# Altium PCB PCB1.PcbDoc (part 7 of 7)
Units mil, origin at the board's own origin, x right, y up, seen from the top; angles counter-clockwise.
Board outline 7650 x 4400 mil, 2 copper layers (Top Layer, Bottom Layer); 123 components, 190 nets, 788 pads, 165 vias.
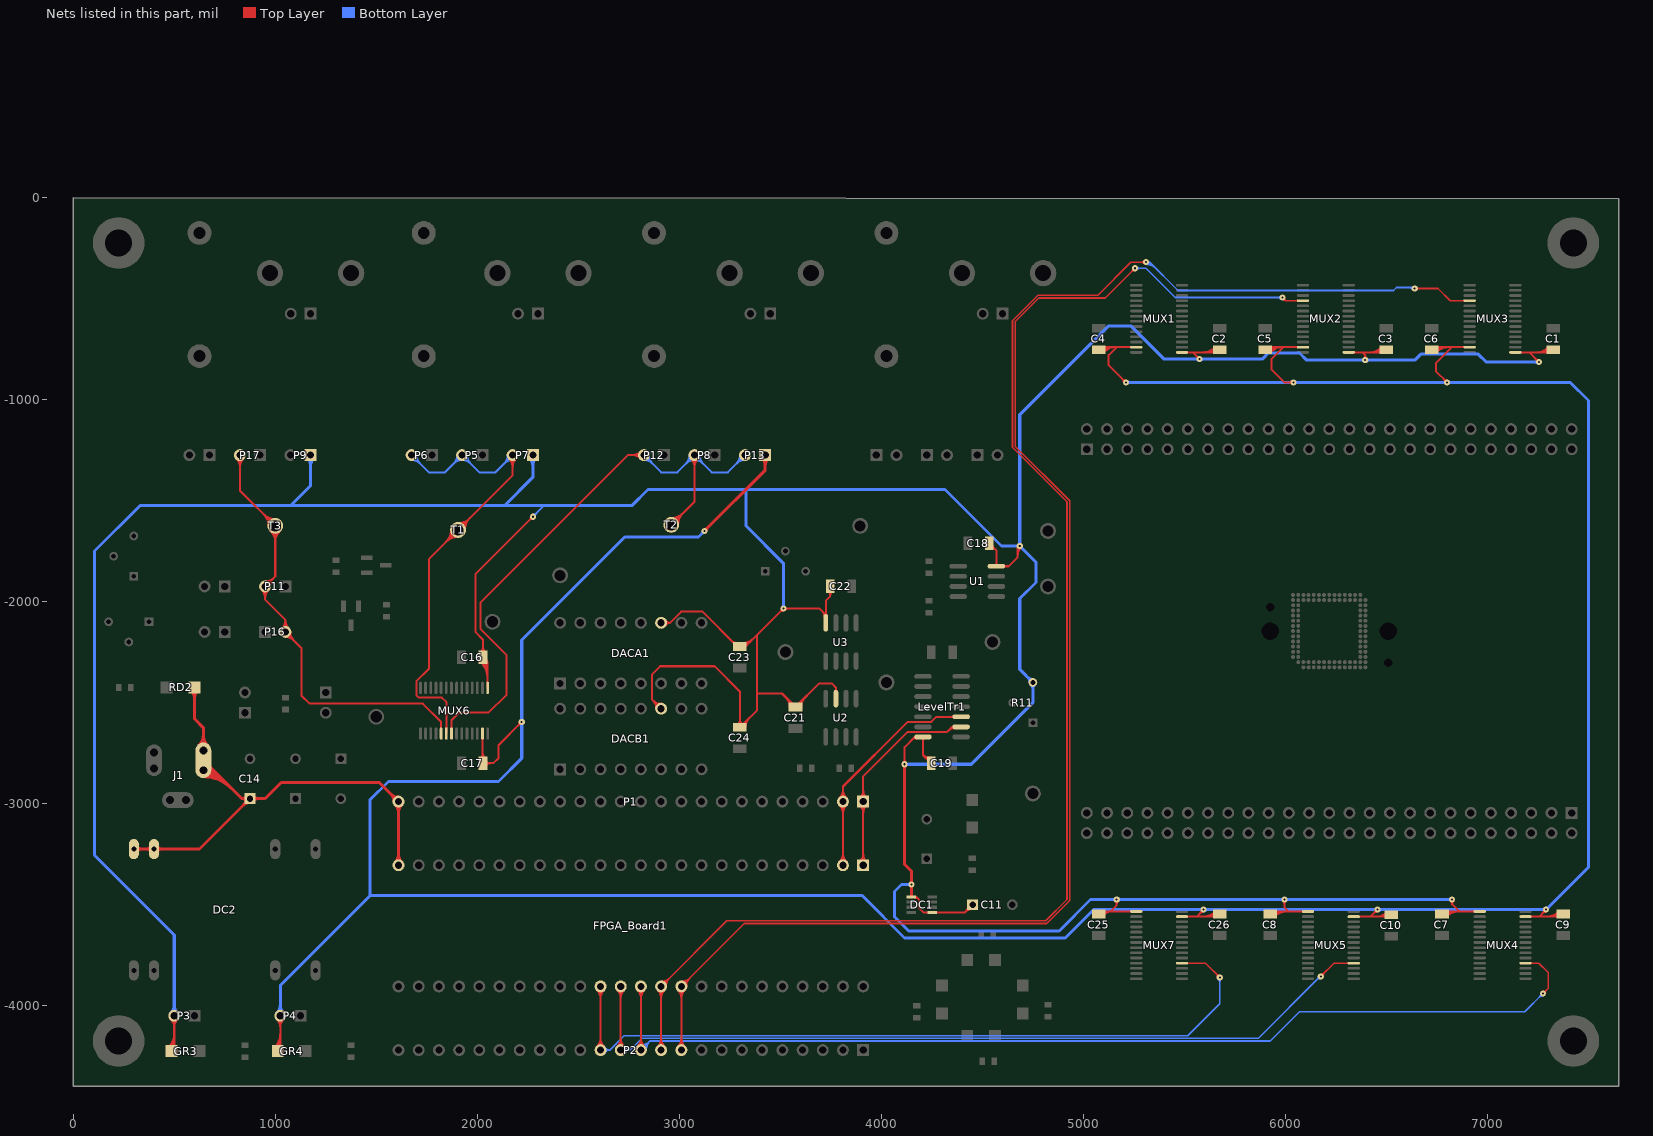
[diagram p7: the nets of this part, all layers, seen from the top]

## Via types
v1: diameter 30, hole 10, Top Layer to Bottom Layer, 118 vias
v2: diameter 20, hole 6, Top Layer to Bottom Layer, 47 vias

## Nets (pads, with @x,y where several pads share a name; then routed paths per layer and width w, separated by ;. In a path a pad name is that pad's centre, name@x,y a point inside that pad or via, vN(x,y) a via of type N, cw(c..) or ccw(c..) an arc to the next point about the centre after c; other vN are vias at no path point) (continued)
S1: FPGA_Board1.39 MUX2.18 P2.10 | length 7627.6
  Top Layer w8: FPGA_Board1.39@3010,-3905 3322,-3593 4818.62,-3593 4932,-3479.62 4932,-1500.38 4662,-1230.38 4662,-614.62 4779.18,-497.43 5107.57,-497.43 v1(5255,-350) ; FPGA_Board1.39@3010,-3887.47 ccw(c3010,-3845.16) 3039.92,-3875.08 ccw(c3069.84,-3905) FPGA_Board1.39@3027.53,-3905 ; FPGA_Board1.39@3010,-3879.47 ccw(c3010,-3817.84) 3053.58,-3861.42 ccw(c3097.16,-3905) FPGA_Board1.39@3035.53,-3905 ; v1@5244,-350 cw(c5217.44,-350) 5236.22,-368.78 cw(c5255,-387.56) v1@5255,-361 ; v1(5985,-495) 6000.43,-510.43 ; v1@5986.63,-505.88 cw(c5989.01,-521.85) 6000.43,-510.43 ; v1@5995.88,-496.63 ccw(c6011.85,-499.01) 6000.43,-510.43 ; MUX2.18@6086.81,-510.43 6000.43,-510.43 ; 6056.21,-510.43 ccw(c6056.21,-503.46) 6061.15,-508.39 cw(c6056.21,-503.46) 6056.21,-510.43 ; 6056.21,-510.43 cw(c6056.21,-517.41) 6061.15,-512.48 ccw(c6056.21,-517.41) 6056.21,-510.43
  Top Layer w10: P2.10@2992.66,-4202.66 ccw(c2950.79,-4160.79) 3010,-4160.79 ccw(c3069.21,-4160.79) P2.10@3027.34,-4202.66 ; FPGA_Board1.39@2992.66,-3922.34 cw(c2950.79,-3964.21) 3010,-3964.21 cw(c3069.21,-3964.21) FPGA_Board1.39@3027.34,-3922.34 ; P2.10@2999.73,-4209.73 ccw(c2974.93,-4184.93) 3010,-4184.93 ccw(c3045.07,-4184.93) P2.10@3020.27,-4209.73 ; FPGA_Board1.39@2999.73,-3915.27 cw(c2974.93,-3940.07) 3010,-3940.07 cw(c3045.07,-3940.07) FPGA_Board1.39@3020.27,-3915.27 ; P2.10@3010,-4220 FPGA_Board1.39@3010,-3905
  Bottom Layer w8: v1(5255,-350) 5310,-350 5455,-495 v1(5985,-495) ; v1@5262.78,-357.78 cw(c5281.56,-376.56) 5281.56,-350 cw(c5281.56,-323.44) v1@5262.78,-342.22 ; v1@5977.22,-502.78 ccw(c5958.44,-521.56) 5958.44,-495 ccw(c5958.44,-468.44) v1@5977.22,-487.22
S2: FPGA_Board1.38 MUX3.18 P2.11 | length 8740.2
  Top Layer w8: FPGA_Board1.38@2910,-3905 3235,-3580 4813.23,-3580 4919,-3474.23 4919,-1505.77 4649,-1235.77 4649,-609.23 4773.8,-484.43 5070.57,-484.43 5235,-320 v1(5310,-320) ; FPGA_Board1.38@2910,-3887.47 ccw(c2910,-3845.16) 2939.92,-3875.08 ccw(c2969.84,-3905) FPGA_Board1.38@2927.53,-3905 ; FPGA_Board1.38@2910,-3879.47 ccw(c2910,-3817.84) 2953.58,-3861.42 ccw(c2997.16,-3905) FPGA_Board1.38@2935.53,-3905 ; v1@5302.22,-327.78 ccw(c5283.44,-346.56) 5283.44,-320 ccw(c5283.44,-293.44) v1@5302.22,-312.22 ; v1(6640,-450) 6755,-450 6815.43,-510.43 MUX3.18@6911.81,-510.43 ; v1@6647.78,-457.78 cw(c6666.56,-476.56) 6666.56,-450 cw(c6666.56,-423.44) v1@6647.78,-442.22 ; 6881.21,-510.43 ccw(c6881.21,-503.46) 6886.15,-508.39 cw(c6881.21,-503.46) 6881.21,-510.43 ; 6881.21,-510.43 cw(c6881.21,-517.41) 6886.15,-512.48 ccw(c6881.21,-517.41) 6881.21,-510.43
  Top Layer w10: P2.11@2892.66,-4202.66 ccw(c2850.79,-4160.79) 2910,-4160.79 ccw(c2969.21,-4160.79) P2.11@2927.34,-4202.66 ; FPGA_Board1.38@2892.66,-3922.34 cw(c2850.79,-3964.21) 2910,-3964.21 cw(c2969.21,-3964.21) FPGA_Board1.38@2927.34,-3922.34 ; P2.11@2899.73,-4209.73 ccw(c2874.93,-4184.93) 2910,-4184.93 ccw(c2945.07,-4184.93) P2.11@2920.27,-4209.73 ; FPGA_Board1.38@2899.73,-3915.27 cw(c2874.93,-3940.07) 2910,-3940.07 cw(c2945.07,-3940.07) FPGA_Board1.38@2920.27,-3915.27 ; P2.11@2910,-4220 FPGA_Board1.38@2910,-3905
  Bottom Layer w8: v1@5310,-331 cw(c5310,-401.33) 5359.73,-351.6 ; v1@5310,-323 cw(c5310,-374.01) 5346.07,-337.94 ; v1(5310,-320) 5328.13,-320 ; v1@5310,-315 cw(c5310,-346.7) 5332.41,-324.28 ; 6601.37,-445 cw(c6601.37,-488.63) v1@6632.22,-457.78 ; 6620.69,-445 cw(c6620.69,-469.31) v1@6637.88,-452.12 ; 6625.51,-445 ccw(c6625.51,-435.51) v1@6632.22,-442.22 ; v1(6640,-450) 6635,-445 6550,-445 6535,-460 5468.13,-460 5328.13,-320 ; 5328.13,-320 ccw(c5328.13,-329.44) 5319.76,-325.08 cw(c5328.13,-329.44) 5328.13,-320 ; 5328.13,-320 cw(c5328.13,-310.56) 5319.76,-314.92 ccw(c5328.13,-310.56) 5328.13,-320
S3: FPGA_Board1.37 MUX4.18 P2.12 | length 5706.8
  Top Layer w8: MUX4.18@7188.19,-3789.57 7254.57,-3789.57 7300,-3835 7300,-3915 v1(7275,-3940) ; v1@7275,-3929 ccw(c7275,-3902.44) 7293.78,-3921.22 ccw(c7312.56,-3940) v1@7286,-3940 ; 7218.79,-3789.57 ccw(c7218.79,-3796.54) 7213.85,-3791.61 cw(c7218.79,-3796.54) 7218.79,-3789.57 ; 7218.79,-3789.57 cw(c7218.79,-3782.59) 7213.85,-3787.52 ccw(c7218.79,-3782.59) 7218.79,-3789.57
  Top Layer w10: P2.12@2792.66,-4202.66 ccw(c2750.79,-4160.79) 2810,-4160.79 ccw(c2869.21,-4160.79) P2.12@2827.34,-4202.66 ; FPGA_Board1.37@2792.66,-3922.34 cw(c2750.79,-3964.21) 2810,-3964.21 cw(c2869.21,-3964.21) FPGA_Board1.37@2827.34,-3922.34 ; P2.12@2799.73,-4209.73 ccw(c2774.93,-4184.93) 2810,-4184.93 ccw(c2845.07,-4184.93) P2.12@2820.27,-4209.73 ; FPGA_Board1.37@2799.73,-3915.27 cw(c2774.93,-3940.07) 2810,-3940.07 cw(c2845.07,-3940.07) FPGA_Board1.37@2820.27,-3915.27 ; P2.12@2810,-4220 FPGA_Board1.37@2810,-3905
  Bottom Layer w8: P2.12@2810,-4220 2855,-4175 5925,-4175 6070,-4030 7185,-4030 v1(7275,-3940) ; P2.12@2810,-4202.47 ccw(c2810,-4160.16) 2839.92,-4190.08 ccw(c2869.84,-4220) P2.12@2827.53,-4220 ; P2.12@2810,-4194.47 ccw(c2810,-4132.84) 2853.58,-4176.42 ccw(c2897.16,-4220) P2.12@2835.53,-4220 ; v1@7264,-3940 cw(c7237.44,-3940) 7256.22,-3958.78 cw(c7275,-3977.56) v1@7275,-3951
S4: FPGA_Board1.36 MUX5.18 P2.13 | length 4618.9
  Top Layer w8: v1(6175,-3855) 6240.43,-3789.57 MUX5.18@6338.19,-3789.57 ; v1@6175,-3844 ccw(c6175,-3817.44) 6193.78,-3836.22 ccw(c6212.56,-3855) v1@6186,-3855 ; 6307.59,-3789.57 ccw(c6307.59,-3782.59) 6312.52,-3787.52 cw(c6307.59,-3782.59) 6307.59,-3789.57 ; 6307.59,-3789.57 cw(c6307.59,-3796.54) 6312.52,-3791.61 ccw(c6307.59,-3796.54) 6307.59,-3789.57
  Top Layer w10: P2.13@2692.66,-4202.66 ccw(c2650.79,-4160.79) 2710,-4160.79 ccw(c2769.21,-4160.79) P2.13@2727.34,-4202.66 ; FPGA_Board1.36@2692.66,-3922.34 cw(c2650.79,-3964.21) 2710,-3964.21 cw(c2769.21,-3964.21) FPGA_Board1.36@2727.34,-3922.34 ; P2.13@2699.73,-4209.73 ccw(c2674.93,-4184.93) 2710,-4184.93 ccw(c2745.07,-4184.93) P2.13@2720.27,-4209.73 ; FPGA_Board1.36@2699.73,-3915.27 cw(c2674.93,-3940.07) 2710,-3940.07 cw(c2745.07,-3940.07) FPGA_Board1.36@2720.27,-3915.27 ; P2.13@2710,-4220 FPGA_Board1.36@2710,-3905
  Bottom Layer w8: P2.13@2710,-4220 2755.51,-4220 ; P2.13@2724.96,-4229.14 cw(c2741.25,-4239.09) 2741.25,-4220 cw(c2741.25,-4200.91) P2.13@2724.96,-4210.86 ; P2.13@2731.78,-4233.31 cw(c2755.51,-4247.81) 2755.51,-4220 ; P2.13@2731.78,-4206.69 ccw(c2755.51,-4192.19) 2755.51,-4220 ; 6151.1,-3875.9 cw(c6175,-3899.8) v1@6175,-3866 ; 6158.34,-3868.66 ccw(c6144.69,-3855) v1@6164,-3855 ; v1(6175,-3855) 6172,-3855 5865,-4162 2813.51,-4162 2755.51,-4220
S5: FPGA_Board1.35 MUX7.18 P2.14 | length 4318.7
  Top Layer w8: MUX7.18@5488.19,-3789.57 5604.57,-3789.57 v1(5675,-3860) ; v1@5664,-3860 ccw(c5637.44,-3860) 5656.22,-3841.22 ccw(c5675,-3822.44) v1@5675,-3849 ; 5518.79,-3789.57 ccw(c5518.79,-3796.54) 5513.85,-3791.61 cw(c5518.79,-3796.54) 5518.79,-3789.57 ; 5518.79,-3789.57 cw(c5518.79,-3782.59) 5513.85,-3787.52 ccw(c5518.79,-3782.59) 5518.79,-3789.57
  Top Layer w10: P2.14@2592.66,-4202.66 ccw(c2550.79,-4160.79) 2610,-4160.79 ccw(c2669.21,-4160.79) P2.14@2627.34,-4202.66 ; FPGA_Board1.35@2592.66,-3922.34 cw(c2550.79,-3964.21) 2610,-3964.21 cw(c2669.21,-3964.21) FPGA_Board1.35@2627.34,-3922.34 ; P2.14@2599.73,-4209.73 ccw(c2574.93,-4184.93) 2610,-4184.93 ccw(c2645.07,-4184.93) P2.14@2620.27,-4209.73 ; FPGA_Board1.35@2599.73,-3915.27 cw(c2574.93,-3940.07) 2610,-3940.07 cw(c2645.07,-3940.07) FPGA_Board1.35@2620.27,-3915.27 ; P2.14@2610,-4220 FPGA_Board1.35@2610,-3905
  Bottom Layer w8: P2.14@2610,-4220 2655.51,-4220 ; P2.14@2624.96,-4229.14 cw(c2641.25,-4239.09) 2641.25,-4220 cw(c2641.25,-4200.91) P2.14@2624.96,-4210.86 ; P2.14@2631.78,-4233.31 cw(c2655.51,-4247.81) 2655.51,-4220 ; P2.14@2631.78,-4206.69 ccw(c2655.51,-4192.19) 2655.51,-4220 ; v1@5667.22,-3867.78 cw(c5648.44,-3886.56) 5675,-3886.56 cw(c5701.56,-3886.56) v1@5682.78,-3867.78 ; v1(5675,-3860) 5675,-3990 5516,-4149 2726.51,-4149 2655.51,-4220
VCOMP1: FPGA_Board1.1 LevelTr1.2 P1.1 | length 1566.2
  Top Layer w10: FPGA_Board1.1@3892.66,-3287.66 ccw(c3850.79,-3245.79) 3910,-3245.79 ccw(c3969.21,-3245.79) FPGA_Board1.1@3927.34,-3287.66 ; P1.1@3892.66,-3007.34 cw(c3850.79,-3049.21) 3910,-3049.21 cw(c3969.21,-3049.21) P1.1@3927.34,-3007.34 ; P1.1@3892.66,-2972.66 ccw(c3850.79,-2930.79) 3910,-2930.79 ccw(c3969.21,-2930.79) P1.1@3927.34,-2972.66 ; FPGA_Board1.1@3899.73,-3294.73 ccw(c3874.93,-3269.93) 3910,-3269.93 ccw(c3945.07,-3269.93) FPGA_Board1.1@3920.27,-3294.73 ; P1.1@3899.73,-3000.27 cw(c3874.93,-3025.07) 3910,-3025.07 cw(c3945.07,-3025.07) P1.1@3920.27,-3000.27 ; P1.1@3899.73,-2979.73 ccw(c3874.93,-2954.93) 3910,-2954.93 ccw(c3945.07,-2954.93) P1.1@3920.27,-2979.73 ; FPGA_Board1.1@3910,-3305 P1.1@3910,-2990 3910,-2865 4130.19,-2644.81 4325.19,-2644.81 4350,-2620 ; 4328.82,-2641.18 cw(c4363.5,-2675.86) LevelTr1.2@4363.5,-2626.81 ; 4345.9,-2624.1 cw(c4363.5,-2641.71) LevelTr1.2@4363.5,-2616.81 ; LevelTr1.2@4395,-2620 4350,-2620 ; 4350,-2620 ccw(c4350,-2610.02) 4358.03,-2615.95 cw(c4350,-2610.02) 4350,-2620 ; 4350,-2620 cw(c4350,-2629.98) 4358.03,-2624.05 ccw(c4350,-2629.98) 4350,-2620
VCOMP2: FPGA_Board1.2 LevelTr1.3 P1.2 | length 1588.1
  Top Layer w10: FPGA_Board1.2@3792.66,-3287.66 ccw(c3750.79,-3245.79) 3810,-3245.79 ccw(c3869.21,-3245.79) FPGA_Board1.2@3827.34,-3287.66 ; P1.2@3792.66,-3007.34 cw(c3750.79,-3049.21) 3810,-3049.21 cw(c3869.21,-3049.21) P1.2@3827.34,-3007.34 ; P1.2@3792.66,-2972.66 ccw(c3750.79,-2930.79) 3810,-2930.79 ccw(c3869.21,-2930.79) P1.2@3827.34,-2972.66 ; FPGA_Board1.2@3799.73,-3294.73 ccw(c3774.93,-3269.93) 3810,-3269.93 ccw(c3845.07,-3269.93) FPGA_Board1.2@3820.27,-3294.73 ; P1.2@3799.73,-3000.27 cw(c3774.93,-3025.07) 3810,-3025.07 cw(c3845.07,-3025.07) P1.2@3820.27,-3000.27 ; P1.2@3799.73,-2979.73 ccw(c3774.93,-2954.93) 3810,-2954.93 ccw(c3845.07,-2954.93) P1.2@3820.27,-2979.73 ; FPGA_Board1.2@3810,-3305 P1.2@3810,-2990 3810,-2915 4130.19,-2594.81 4247.8,-2594.81 4272.61,-2570 LevelTr1.3@4395,-2570 ; LevelTr1.3@4358.69,-2574.82 ccw(c4347.06,-2586.44) 4347.06,-2570 ccw(c4347.06,-2553.56) LevelTr1.3@4358.69,-2565.18
VDD: C1.2 C2.1 C3.1 C7.1 C8.2 C11.1 C16.1 C18.2 C19.2 C21.1 C22.2 C23.1 C24.2 C25.2 DACA1.11 DACB1.11 DC1.1 DC1.5 GR3.1 LevelTr1.14 MUX1.1 MUX2.1 MUX3.1 MUX4.1 MUX5.1 MUX6.1 MUX7.1 P3.2 P7.1 P9.1 R11.3 U1.8 U2.7 U3.8 | length 28566.7
  Top Layer w10: GR3.1@469.86,-4207.66 ccw(c397.1,-4134.89) 500,-4134.89 ; GR3.1@476.93,-4214.73 ccw(c421.24,-4159.04) 500,-4159.04 ; P3.2@482.66,-4067.34 cw(c440.79,-4109.21) 500,-4109.21 cw(c559.21,-4109.21) P3.2@517.34,-4067.34 ; GR3.1@484,-4221.8 ccw(c445.38,-4183.18) 500,-4183.18 ; GR3.1@487.2,-4225 500,-4212.2 P3.2@500,-4050 ; P3.2@489.73,-4060.27 cw(c464.93,-4085.07) 500,-4085.07 cw(c535.07,-4085.07) P3.2@510.27,-4060.27 ; GR3.1@500,-4196.68 ccw(c515.53,-4196.68) GR3.1@504.55,-4207.66 ; C16.1@2016.37,-2298.59 cw(c1931.96,-2383) 2051.34,-2383 ; C16.1@2016.37,-2251.41 ccw(c1987.94,-2222.98) 2028.15,-2222.98 ccw(c2068.35,-2222.98) C16.1@2039.93,-2251.41 ; C16.1@2023.44,-2291.52 cw(c1956.1,-2358.86) 2051.34,-2358.86 ; C16.1@2030.52,-2284.44 cw(c1980.25,-2334.72) 2051.34,-2334.72 ; C16.1@2037.59,-2277.37 cw(c2004.39,-2310.57) 2051.34,-2310.57 ; C16.1@2044.8,-2286.81 ccw(c2056.49,-2286.81) C16.1@2048.23,-2295.08 ; MUX6.1@2051.34,-2426.81 2051.34,-2298.19 C16.1@2028.15,-2275 2028.15,-2188.15 1990,-2150 1990,-1865 v1(2275,-1580) ; v1@2265,-1580 cw(c2240.86,-1580) 2257.93,-1597.07 cw(c2275,-1614.14) v1@2275,-1590 ; DACB1.11@2885.47,-2530 ccw(c2826.26,-2530) 2868.13,-2488.13 ccw(c2910,-2446.26) DACB1.11@2910,-2505.47 ; DACB1.11@2895.47,-2530 ccw(c2860.4,-2530) 2885.2,-2505.2 ccw(c2910,-2480.4) DACB1.11@2910,-2515.47 ; DACB1.11@2910,-2530 2865,-2485 2865,-2360 2905,-2320 3175,-2320 3300,-2445 C24.2@3300,-2621.85 3385,-2536.85 3385,-2455 ; DACA1.11@2910,-2105 2954.1,-2105 ; DACA1.11@2930.84,-2117.94 cw(c2954.1,-2132.38) 2954.1,-2105 ; DACA1.11@2930.84,-2092.06 ccw(c2954.1,-2077.62) 2954.1,-2105 ; 3257.72,-2192.58 ccw(c3288.19,-2162.1) C23.1@3288.19,-2205.2 ; 3260.61,-2195.46 cw(c3234.22,-2221.85) C23.1@3271.54,-2221.85 ; C23.1@3285,-2221.85 C23.1@3285,-2219.86 ; C23.1@3286.99,-2221.85 C23.1@3285,-2219.86 ; C24.2@3288.22,-2610.07 ccw(c3259.79,-2581.65) 3300,-2581.65 ccw(c3340.21,-2581.65) C24.2@3311.78,-2610.07 ; C23.1@3300,-2221.85 3328.15,-2221.85 3385,-2165 ; C24.2@3311.81,-2605.2 ccw(c3311.81,-2593.51) C24.2@3320.08,-2601.77 ; C23.1@3311.81,-2225.2 ccw(c3311.81,-2193.83) 3333.99,-2216.01 ; C23.1@3311.81,-2215.2 ccw(c3311.81,-2159.69) 3351.06,-2198.94 ; C23.1@3311.81,-2205.2 ccw(c3311.81,-2125.55) 3368.13,-2181.87 ; C24.2@3318.46,-2621.85 cw(c3363.04,-2621.85) 3331.52,-2590.33 ; C24.2@3328.46,-2621.85 cw(c3397.18,-2621.85) 3348.59,-2573.26 ; v1@3505,-2035 cw(c3480.86,-2035) 3497.93,-2052.07 cw(c3515,-2069.14) v1@3515,-2045 ; v1@3522.07,-2042.07 cw(c3539.14,-2059.14) 3539.14,-2035 cw(c3539.14,-2010.86) v1@3522.07,-2027.93 ; 3526.41,-2473.26 cw(c3477.82,-2521.85) C21.1@3546.54,-2521.85 ; 3543.48,-2490.33 cw(c3511.96,-2521.85) C21.1@3556.54,-2521.85 ; C21.1@3554.92,-2501.77 ccw(c3563.19,-2493.51) C21.1@3563.19,-2505.2 ; C21.1@3586.81,-2505.2 ccw(c3586.81,-2493.51) C21.1@3595.08,-2501.77 ; C21.1@3593.46,-2521.85 cw(c3638.04,-2521.85) 3606.52,-2490.33 ; C21.1@3603.46,-2521.85 cw(c3672.18,-2521.85) 3623.59,-2473.26 ; 3707,-2047 cw(c3679.98,-2074.02) U3.8@3718.19,-2074.02 ; U3.8@3720.18,-2069.2 ccw(c3708.56,-2057.57) 3725,-2057.57 ccw(c3741.44,-2057.57) U3.8@3729.82,-2069.2 ; U3.8@3725,-2105.51 U3.8@3725,-2065 ; C22.2@3735.98,-1949.43 cw(c3715.54,-1973.15) 3746.85,-1973.15 ; C22.2@3746.85,-1925 3746.85,-1973.15 ; C22.2@3757.72,-1949.43 ccw(c3778.17,-1973.15) 3746.85,-1973.15 ; U2.7@3770.18,-2444.2 ccw(c3758.56,-2432.57) 3775,-2432.57 ccw(c3791.44,-2432.57) U2.7@3779.82,-2444.2 ; U2.7@3775,-2480.51 3775,-2425 3755,-2405 3691.85,-2405 C21.1@3575,-2521.85 3508.15,-2455 3385,-2455 ; v1@4107.93,-2797.93 ccw(c4090.86,-2780.86) 4115,-2780.86 ccw(c4139.14,-2780.86) v1@4122.07,-2797.93 ; v1(4115,-2805) 4115,-2720 4165,-2670 LevelTr1.14@4206.02,-2670 4206.02,-2759.17 ; 4146.64,-2688.36 cw(c4174.53,-2716.26) LevelTr1.14@4174.53,-2676.81 ; DC1.1@4148.43,-3461.61 4173.11,-3461.61 4185.44,-3473.95 4185.44,-3515.44 4208.39,-3538.39 DC1.5@4251.57,-3538.39 4413.19,-3538.39 C11.1@4451.57,-3500 ; DC1.1@4167.06,-3460.18 ccw(c4181.27,-3451.97) 4177.02,-3467.83 ; 4219.99,-2773.14 ccw(c4241.28,-2751.85) C19.2@4245.84,-2781.61 ; C19.2@4226.77,-2779.92 cw(c4218.51,-2788.19) C19.2@4230.2,-2788.19 ; C19.2@4244.33,-2771.73 cw(c4237.57,-2727.63) 4206.03,-2759.17 ; C19.2@4246.85,-2800 4206.02,-2759.17 ; C11.1@4430,-3500 cw(c4377.91,-3500) 4414.74,-3536.83 cw(c4451.57,-3573.66) C11.1@4451.57,-3521.57 ; C11.1@4440,-3500 cw(c4412.06,-3500) 4431.82,-3519.76 cw(c4451.57,-3539.52) C11.1@4451.57,-3511.57 ; C18.2@4533.58,-1710 4569.49,-1745.91 ; C18.2@4535.42,-1728.21 cw(c4541.62,-1749.78) 4557.49,-1733.91 ; C18.2@4538.18,-1737.82 cw(c4546.97,-1768.42) 4569.49,-1745.9 ; C18.2@4550.24,-1721.81 ccw(c4561.93,-1721.81) C18.2@4553.66,-1730.08 ; U1.8@4605.8,-1829.82 cw(c4617.43,-1841.44) 4617.43,-1825 cw(c4617.43,-1808.56) U1.8@4605.8,-1820.18 ; 4675,-1773.28 cw(c4733.28,-1773.28) v1@4692.07,-1732.07 ; 4675,-1749.14 cw(c4709.14,-1749.14) v1(4685,-1725) 4675,-1735 4675,-1780 4630,-1825 U1.8@4569.49,-1825 4569.49,-1745.91 ; C25.2@5075,-3546.85 5088.19,-3533.66 5135,-3533.66 ; C25.2@5092.77,-3549.82 cw(c5118.85,-3562.8) 5118.85,-3533.66 ; C25.2@5101.72,-3554.27 cw(c5135,-3570.83) 5135,-3533.66 ; v1@5157.93,-3482.07 cw(c5140.86,-3499.14) 5165,-3499.14 cw(c5189.14,-3499.14) v1@5172.07,-3482.07 ; v1(5165,-3475) 5165,-3503.66 5135,-3533.66 ; MUX7.1@5261.81,-3533.66 5135,-3533.66 ; MUX1.1@5488.19,-766.34 5541.34,-766.34 ; v1@5565,-800 ccw(c5540.86,-800) 5557.93,-782.93 ccw(c5575,-765.86) v1@5575,-790 ; v1(5575,-800) 5541.34,-766.34 ; 5591.14,-766.34 ccw(c5591.14,-681.1) C2.1@5651.41,-741.37 ; 5615.28,-766.34 ccw(c5615.28,-705.25) C2.1@5658.48,-748.44 ; 5639.43,-766.34 ccw(c5639.43,-729.39) C2.1@5665.56,-755.52 ; C2.1@5675,-753.15 5661.81,-766.34 5541.34,-766.34 ; C8.2@5925,-3546.85 5938.19,-3533.66 6015,-3533.66 ; C8.2@5934.44,-3544.48 cw(c5960.57,-3570.61) 5960.57,-3533.66 ; C8.2@5941.52,-3551.56 cw(c5984.72,-3594.75) 5984.72,-3533.66 ; C8.2@5948.59,-3558.63 cw(c6008.86,-3618.9) 6008.86,-3533.66 ; v1@5987.93,-3482.07 cw(c5970.86,-3499.14) 5995,-3499.14 cw(c6019.14,-3499.14) v1@6002.07,-3482.07 ; v1(5995,-3475) 5995,-3513.66 6015,-3533.66 ; MUX5.1@6111.81,-3533.66 6015,-3533.66 ; MUX2.1@6313.19,-766.34 6380,-766.34 ; v1@6388.03,-797.83 ccw(c6372.01,-781.34) 6395,-781.34 ; v1(6395,-805) 6395,-781.34 ; v1@6401.97,-797.83 cw(c6417.99,-781.34) 6395,-781.34 ; 6416.14,-766.34 ccw(c6416.14,-681.1) C3.1@6476.41,-741.37 ; 6440.28,-766.34 ccw(c6440.28,-705.25) C3.1@6483.48,-748.44 ; 6464.43,-766.34 ccw(c6464.43,-729.39) C3.1@6490.56,-755.52 ; C3.1@6500,-753.15 6486.81,-766.34 6380,-766.34 ; C7.1@6775,-3546.85 6788.19,-3533.66 6860,-3533.66 ; C7.1@6784.44,-3544.48 cw(c6810.57,-3570.61) 6810.57,-3533.66 ; C7.1@6791.52,-3551.56 cw(c6834.72,-3594.75) 6834.72,-3533.66 ; C7.1@6798.59,-3558.63 cw(c6858.86,-3618.9) 6858.86,-3533.66 ; v1@6818.03,-3482.17 cw(c6802.01,-3498.66) 6825,-3498.66 ; v1(6825,-3475) 6825,-3498.66 ; v1@6831.97,-3482.17 ccw(c6847.99,-3498.66) 6825,-3498.66 ; MUX4.1@6961.81,-3533.66 6860,-3533.66 ; MUX3.1@7138.19,-766.34 7206.34,-766.34 ; 7241.14,-766.34 ccw(c7241.14,-681.1) C1.2@7301.41,-741.37 ; v1@7245,-815 ccw(c7220.86,-815) 7237.93,-797.93 ccw(c7255,-780.86) v1@7255,-805 ; v1(7255,-815) 7206.34,-766.34 ; 7265.28,-766.34 ccw(c7265.28,-705.25) C1.2@7308.48,-748.44 ; 7289.43,-766.34 ccw(c7289.43,-729.39) C1.2@7315.56,-755.52 ; C1.2@7325,-753.15 7311.81,-766.34 7206.34,-766.34 ; 2954.1,-2105 3009.1,-2050 3115.14,-2050 C23.1@3285,-2219.86 ; 3385,-2455 3385,-2165 ; 3385,-2165 v1(3515,-2035) 3695,-2035 U3.8@3725,-2065 ; U3.8@3725,-2065 3725,-1995 3746.85,-1973.15 ; 4206.02,-2686.44 ccw(c4189.58,-2686.44) 4201.21,-2674.82 cw(c4189.58,-2686.44) 4206.02,-2686.44 ; 4206.02,-2686.44 cw(c4222.47,-2686.44) 4210.84,-2674.82 ccw(c4222.47,-2686.44) 4206.02,-2686.44 ; 4569.49,-1808.56 ccw(c4585.93,-1808.56) 4574.3,-1820.18 cw(c4585.93,-1808.56) 4569.49,-1808.56 ; 4569.49,-1808.56 cw(c4553.05,-1808.56) 4564.67,-1820.18 ccw(c4553.05,-1808.56) 4569.49,-1808.56 ; 6380,-766.34 6395,-781.34 ; 6825,-3498.66 6860,-3533.66 ; DC1.1@4164.57,-3464.49 cw(c4164.57,-3492.05) 4184.06,-3472.56 ccw(c4164.57,-3492.05) DC1.1@4164.57,-3464.49
  Top Layer w15: v1@4109.7,-2810.3 cw(c4096.89,-2823.11) 4115,-2823.11 cw(c4133.11,-2823.11) v1@4120.3,-2810.3 ; v1(4115,-2805) 4115,-3300 4148.43,-3333.43 v1(4148.43,-3400) DC1.1@4148.43,-3461.61 ; v1@4143.12,-3405.3 cw(c4130.32,-3418.11) 4148.43,-3418.11 cw(c4166.53,-3418.11) v1@4153.73,-3405.3 ; v1@4143.12,-3394.7 ccw(c4130.32,-3381.89) 4148.43,-3381.89 ccw(c4166.53,-3381.89) v1@4153.73,-3394.7
  Bottom Layer w10: v1(2275,-1580) 2330,-1525 ; v1@2275,-1570 ccw(c2275,-1545.86) 2292.07,-1562.93 ccw(c2309.14,-1580) v1@2285,-1580
  Bottom Layer w15: P3.2@484.42,-4034.42 ccw(c446.82,-3996.82) 500,-3996.82 ccw(c553.18,-3996.82) P3.2@515.58,-4034.42 ; P3.2@500,-4050 500,-3650 105,-3255 105,-1750 330,-1525 1075,-1525 ; P9.1@1159.42,-1290.58 cw(c1121.82,-1328.18) 1175,-1328.18 cw(c1228.18,-1328.18) P9.1@1190.58,-1290.58 ; P9.1@1175,-1275 1175,-1425 1075,-1525 ; P7.1@2259.42,-1290.58 cw(c2221.82,-1328.18) 2275,-1328.18 cw(c2328.18,-1328.18) P7.1@2290.58,-1290.58 ; P7.1@2275,-1275 2275,-1385 2135,-1525 ; v1@3509.7,-2029.7 ccw(c3496.89,-2016.89) 3515,-2016.89 ccw(c3533.11,-2016.89) v1@3520.3,-2029.7 ; v1(3515,-2035) 3515,-1810 3330,-1625 3330,-1445 ; v1(4115,-2805) 4445,-2805 4750,-2500 R11.3@4750,-2400 4685,-2335 4685,-1985 4765,-1905 4765,-1805 v1(4685,-1725) ; v1@4120.3,-2810.3 cw(c4133.11,-2823.11) 4133.11,-2805 cw(c4133.11,-2786.89) v1@4120.3,-2799.7 ; v1@4143.12,-3405.3 ccw(c4130.32,-3418.11) 4130.32,-3400 ccw(c4130.32,-3381.89) v1@4143.12,-3394.7 ; v1(4148.43,-3400) 4100,-3400 4065,-3435 4065,-3560 4135,-3630 4880,-3630 5035,-3475 v1(5165,-3475) v1(5995,-3475) v1(6825,-3475) ; v1@4679.7,-1730.3 ccw(c4666.89,-1743.11) 4666.89,-1725 ccw(c4666.89,-1706.89) 4679.7,-1719.7 ccw(c4666.89,-1706.89) 4685,-1706.89 ccw(c4703.11,-1706.89) v1@4690.3,-1719.7 ; v1@4685,-1732.5 cw(c4685,-1750.61) 4697.8,-1737.8 cw(c4710.61,-1725) v1@4692.5,-1725 ; R11.3@4735.85,-2400 ccw(c4701.68,-2400) 4725.84,-2375.84 ccw(c4750,-2351.68) R11.3@4750,-2385.85 ; R11.3@4739.99,-2410.01 cw(c4715.83,-2434.17) 4750,-2434.17 cw(c4784.17,-2434.17) R11.3@4760.01,-2410.01 ; v1@5159.7,-3480.3 ccw(c5146.89,-3493.11) 5146.89,-3475 ccw(c5146.89,-3456.89) v1@5159.7,-3469.7 ; v1@5170.3,-3480.3 cw(c5183.11,-3493.11) 5183.11,-3475 cw(c5183.11,-3456.89) v1@5170.3,-3469.7 ; v1@5569.7,-805.3 ccw(c5556.89,-818.11) 5556.89,-800 ccw(c5556.89,-781.89) v1@5569.7,-794.7 ; v1@5580.3,-805.3 cw(c5593.11,-818.11) 5593.11,-800 cw(c5593.11,-781.89) v1@5580.3,-794.7 ; v1@5989.7,-3480.3 ccw(c5976.89,-3493.11) 5976.89,-3475 ccw(c5976.89,-3456.89) v1@5989.7,-3469.7 ; v1@6000.3,-3480.3 cw(c6013.11,-3493.11) 6013.11,-3475 cw(c6013.11,-3456.89) v1@6000.3,-3469.7 ; v1@6389.7,-810.3 ccw(c6376.89,-823.11) 6376.89,-805 ccw(c6376.89,-786.89) v1@6389.7,-799.7 ; v1@6400.3,-810.3 cw(c6413.11,-823.11) 6413.11,-805 cw(c6413.11,-786.89) v1@6400.3,-799.7 ; v1@6819.7,-3480.3 ccw(c6806.89,-3493.11) 6806.89,-3475 ccw(c6806.89,-3456.89) v1@6819.7,-3469.7 ; v1@7249.7,-820.3 ccw(c7236.89,-833.11) 7236.89,-815 ccw(c7236.89,-796.89) v1@7249.7,-809.7 ; v1(7255,-815) 6995,-815 6955,-775 6670,-775 6640,-805 v1(6395,-805) 6105,-805 6070,-770 5915,-770 5885,-800 v1(5575,-800) 5400,-800 5235,-635 5125,-635 4685,-1075 v1(4685,-1725) ; 1075,-1525 2135,-1525 ; 2135,-1525 2330,-1525 2765,-1525 2845,-1445 3330,-1445 ; 3330,-1445 4315,-1445 4595,-1725 v1(4685,-1725)
VFORM: MUX6.19 P11.2 P16.2 P17.2 T3.1 | length 3346.3
  Top Layer w10: P17.2@807.66,-1292.34 cw(c765.79,-1334.21) 825,-1334.21 cw(c884.21,-1334.21) P17.2@842.34,-1292.34 ; P17.2@814.73,-1285.27 cw(c789.93,-1310.07) 825,-1310.07 cw(c860.07,-1310.07) P17.2@835.27,-1285.27 ; P17.2@825,-1275 825,-1450 T3.1@1000,-1625 1000,-1875 P11.2@950,-1925 950,-1990 1050,-2090 P16.2@1050,-2150 1130,-2230 1130,-2465 1170,-2505 1730,-2505 1821.02,-2596.02 MUX6.19@1821.02,-2653.19 ; P11.2@932.66,-1942.34 cw(c890.79,-1984.21) 950,-1984.21 cw(c1009.21,-1984.21) P11.2@967.34,-1942.34 ; P11.2@939.73,-1935.27 cw(c914.93,-1960.07) 950,-1960.07 cw(c985.07,-1960.07) P11.2@960.27,-1935.27 ; P11.2@950,-1910.47 ccw(c950,-1875.4) 974.8,-1900.2 ccw(c999.6,-1925) P11.2@964.53,-1925 ; P11.2@950,-1900.47 ccw(c950,-1841.26) 991.87,-1883.13 ccw(c1033.74,-1925) P11.2@974.53,-1925 ; T3.1@965.63,-1625 ccw(c882.65,-1625) 941.33,-1566.33 ccw(c1000,-1507.65) T3.1@1000,-1590.63 ; T3.1@975.63,-1625 ccw(c916.8,-1625) 958.4,-1583.4 ccw(c1000,-1541.8) T3.1@1000,-1600.63 ; T3.1@975.7,-1649.3 cw(c917.02,-1707.98) 1000,-1707.98 cw(c1082.98,-1707.98) T3.1@1024.3,-1649.3 ; T3.1@982.77,-1642.23 cw(c941.17,-1683.83) 1000,-1683.83 cw(c1058.83,-1683.83) T3.1@1017.23,-1642.23 ; P16.2@1032.66,-2132.66 ccw(c990.79,-2090.79) 1050,-2090.79 ccw(c1109.21,-2090.79) P16.2@1067.34,-2132.66 ; P16.2@1039.73,-2139.73 ccw(c1014.93,-2114.93) 1050,-2114.93 ccw(c1085.07,-2114.93) P16.2@1060.27,-2139.73 ; P16.2@1050,-2174.53 cw(c1050,-2233.74) 1091.87,-2191.87 cw(c1133.74,-2150) P16.2@1074.53,-2150 ; P16.2@1050,-2164.53 cw(c1050,-2199.6) 1074.8,-2174.8 cw(c1099.6,-2150) P16.2@1064.53,-2150
VRESET: MUX6.21 P8.2 P12.2 P13.2 T2.1 | length 4157.2
  Top Layer w10: MUX6.21@1872.2,-2653.19 1872.2,-2587.8 1910,-2550 2055,-2550 2145,-2460 2145,-2265 2015,-2135 2015,-2005 2745,-1275 P12.2@2825,-1275 ; P12.2@2807.66,-1292.34 ccw(c2765.79,-1334.21) 2765.79,-1275 ccw(c2765.79,-1215.79) P12.2@2807.66,-1257.66 ; P12.2@2814.73,-1285.27 ccw(c2789.93,-1310.07) 2789.93,-1275 ccw(c2789.93,-1239.93) P12.2@2814.73,-1264.73 ; T2.1@2960,-1620 3075,-1505 P8.2@3075,-1275 ; T2.1@2960,-1595.63 ccw(c2960,-1536.8) 3001.6,-1578.4 ccw(c3043.2,-1620) T2.1@2984.37,-1620 ; T2.1@2960,-1585.63 ccw(c2960,-1502.65) 3018.67,-1561.33 ccw(c3077.35,-1620) T2.1@2994.37,-1620 ; P8.2@3057.66,-1292.34 cw(c3015.79,-1334.21) 3075,-1334.21 cw(c3134.21,-1334.21) P8.2@3092.34,-1292.34 ; P8.2@3064.73,-1285.27 cw(c3039.93,-1310.07) 3075,-1310.07 cw(c3110.07,-1310.07) P8.2@3085.27,-1285.27
  Bottom Layer w10: P12.2@2825,-1299.53 cw(c2825,-1358.74) 2866.87,-1316.87 cw(c2908.74,-1275) P12.2@2849.53,-1275 ; P12.2@2825,-1289.53 cw(c2825,-1324.6) 2849.8,-1299.8 cw(c2874.6,-1275) P12.2@2839.53,-1275 ; P12.2@2825,-1275 2910,-1360 2990,-1360 P8.2@3075,-1275 3160,-1360 3240,-1360 P13.2@3325,-1275 ; P8.2@3050.47,-1275 cw(c2991.26,-1275) 3033.13,-1316.87 cw(c3075,-1358.74) 3075,-1299.53 cw(c3075,-1358.74) 3116.87,-1316.87 cw(c3158.74,-1275) P8.2@3099.53,-1275 ; P8.2@3060.47,-1275 cw(c3025.4,-1275) 3050.2,-1299.8 cw(c3075,-1324.6) 3075,-1289.53 cw(c3075,-1324.6) 3099.8,-1299.8 cw(c3124.6,-1275) P8.2@3089.53,-1275 ; P13.2@3300.47,-1275 cw(c3241.26,-1275) 3283.13,-1316.87 cw(c3325,-1358.74) P13.2@3325,-1299.53 ; P13.2@3310.47,-1275 cw(c3275.4,-1275) 3300.2,-1299.8 cw(c3325,-1324.6) P13.2@3325,-1289.53
VSET: MUX6.20 P5.2 P6.2 P7.2 T1.1 | length 3555.9
  Top Layer w10: MUX6.20@1846.61,-2653.19 1846.61,-2496.61 1825,-2475 1710,-2475 1698.77,-2463.77 1698.77,-2394.95 1760,-2333.72 1760,-1790 T1.1@1905,-1645 2175,-1375 P7.2@2175,-1275 ; T1.1@1870.63,-1645 cw(c1787.65,-1645) 1846.33,-1703.67 cw(c1905,-1762.35) T1.1@1905,-1679.37 ; T1.1@1880.63,-1645 cw(c1821.8,-1645) 1863.4,-1686.6 cw(c1905,-1728.2) T1.1@1905,-1669.37 ; T1.1@1905,-1620.63 ccw(c1905,-1561.8) 1946.6,-1603.4 ccw(c1988.2,-1645) T1.1@1929.37,-1645 ; T1.1@1905,-1610.63 ccw(c1905,-1527.65) 1963.67,-1586.33 ccw(c2022.35,-1645) T1.1@1939.37,-1645 ; P5.2@1925,-1300 P5.2@1925,-1275 ; P7.2@2157.66,-1292.34 cw(c2115.79,-1334.21) 2175,-1334.21 cw(c2234.21,-1334.21) P7.2@2192.34,-1292.34 ; P7.2@2164.73,-1285.27 cw(c2139.93,-1310.07) 2175,-1310.07 cw(c2210.07,-1310.07) P7.2@2185.27,-1285.27
  Bottom Layer w10: P6.2@1675,-1299.53 cw(c1675,-1358.74) 1716.87,-1316.87 cw(c1758.74,-1275) P6.2@1699.53,-1275 ; P6.2@1675,-1289.53 cw(c1675,-1324.6) 1699.8,-1299.8 cw(c1724.6,-1275) P6.2@1689.53,-1275 ; P6.2@1675,-1275 1760,-1360 1840,-1360 P5.2@1925,-1275 2010,-1360 2090,-1360 P7.2@2175,-1275 ; P5.2@1900.47,-1275 cw(c1841.26,-1275) 1883.13,-1316.87 cw(c1925,-1358.74) 1925,-1299.53 cw(c1925,-1358.74) 1966.87,-1316.87 cw(c2008.74,-1275) P5.2@1949.53,-1275 ; P5.2@1910.47,-1275 cw(c1875.4,-1275) 1900.2,-1299.8 cw(c1925,-1324.6) 1925,-1289.53 cw(c1925,-1324.6) 1949.8,-1299.8 cw(c1974.6,-1275) P5.2@1939.53,-1275 ; P7.2@2150.47,-1275 cw(c2091.26,-1275) 2133.13,-1316.87 cw(c2175,-1358.74) P7.2@2175,-1299.53 ; P7.2@2160.47,-1275 cw(c2125.4,-1275) 2150.2,-1299.8 cw(c2175,-1324.6) P7.2@2175,-1289.53
VSS: C4.1 C5.1 C6.2 C9.2 C10.2 C17.2 C26.2 GR4.2 MUX1.27 MUX2.27 MUX3.27 MUX4.27 MUX5.27 MUX6.27 MUX7.27 P4.2 P13.1 | length 20506.2
  Top Layer w10: GR4.2@994.86,-4207.66 ccw(c922.1,-4134.89) 1025,-4134.89 ; GR4.2@1001.93,-4214.73 ccw(c946.24,-4159.04) 1025,-4159.04 ; P4.2@1007.66,-4067.34 cw(c965.79,-4109.21) 1025,-4109.21 cw(c1084.21,-4109.21) P4.2@1042.34,-4067.34 ; GR4.2@1009,-4221.8 ccw(c970.38,-4183.18) 1025,-4183.18 ; GR4.2@1012.2,-4225 1025,-4212.2 P4.2@1025,-4050 ; P4.2@1014.73,-4060.27 cw(c989.93,-4085.07) 1025,-4085.07 cw(c1060.07,-4085.07) P4.2@1035.27,-4060.27 ; GR4.2@1025,-4196.68 ccw(c1040.53,-4196.68) GR4.2@1029.55,-4207.66 ; C17.2@2016.37,-2776.41 ccw(c1993.74,-2753.78) 2025.75,-2753.78 ; 2025.75,-2766.33 ccw(c2050.01,-2766.33) C17.2@2032.85,-2783.48 ; 2025.75,-2742.19 ccw(c2074.15,-2742.19) C17.2@2039.93,-2776.41 ; MUX6.27@2025.75,-2653.19 2025.75,-2797.6 C17.2@2028.15,-2800 2080,-2800 2105,-2775 2105,-2710 v1(2220,-2595) ; C17.2@2039.93,-2811.78 cw(c2068.35,-2840.21) 2068.35,-2800 cw(c2068.35,-2759.79) C17.2@2039.93,-2788.22 ; v1@2210,-2595 cw(c2185.86,-2595) 2202.93,-2612.07 cw(c2220,-2629.14) v1@2220,-2605 ; C4.1@5075,-753.15 5087.4,-740.75 5164.25,-740.75 ; C4.1@5084.18,-755.22 ccw(c5098.48,-743.99) C4.1@5107.58,-759.74 ; C4.1@5092.04,-749.04 ccw(c5107.64,-736.79) 5117.56,-753.97 ; C4.1@5099.29,-742.12 ccw(c5108.4,-734.06) 5114.48,-744.59 ; C4.1@5099.91,-742.87 ccw(c5116.81,-729.6) 5127.55,-748.2 ; C4.1@5102.9,-757.46 cw(c5120.54,-762.19) 5111.41,-746.37 ; v1@5200,-915 ccw(c5175.86,-915) 5192.93,-897.93 ccw(c5210,-880.86) v1@5210,-905 ; v1(5210,-915) 5125,-830 5125,-780 5164.25,-740.75 ; MUX1.27@5261.81,-740.75 5164.25,-740.75 ; MUX7.27@5488.19,-3559.25 5560.75,-3559.25 ; v1@5585,-3525 cw(c5560.86,-3525) 5577.93,-3542.07 cw(c5595,-3559.14) v1@5595,-3535 ; 5593.04,-3559.25 ccw(c5593.04,-3476.71) C26.2@5651.41,-3535.07 ; v1(5595,-3525) 5560.75,-3559.25 ; 5617.19,-3559.25 ccw(c5617.19,-3500.85) C26.2@5658.48,-3542.15 ; 5641.33,-3559.25 ccw(c5641.33,-3524.99) C26.2@5665.56,-3549.22 ; C26.2@5675,-3546.85 5662.6,-3559.25 5560.75,-3559.25 ; C5.1@5900,-753.15 5912.4,-740.75 5990,-740.75 ; C5.1@5909.18,-755.22 ccw(c5923.48,-743.99) C5.1@5932.58,-759.74 ; C5.1@5917.04,-749.04 ccw(c5932.64,-736.79) 5942.56,-753.97 ; C5.1@5924.29,-742.12 ccw(c5933.4,-734.06) 5939.48,-744.59 ; C5.1@5924.91,-742.87 ccw(c5941.81,-729.6) 5952.55,-748.2 ; C5.1@5927.9,-757.46 cw(c5945.54,-762.19) 5936.41,-746.37 ; v1@6032.93,-922.07 ccw(c6015.86,-939.14) 6015.86,-915 ccw(c6015.86,-890.86) v1@6032.93,-907.93 ; v1(6040,-915) 5995,-915 5930,-850 5930,-800.75 5990,-740.75 ; MUX2.27@6086.81,-740.75 5990,-740.75 ; MUX5.27@6338.19,-3559.25 6420.75,-3559.25 ; v1@6445,-3525 cw(c6420.86,-3525) 6437.93,-3542.07 cw(c6455,-3559.14) v1@6455,-3535 ; 6450.65,-3559.25 ccw(c6450.65,-3487.46) C10.2@6501.41,-3538.22 ; v1(6455,-3525) 6420.75,-3559.25 ; 6474.79,-3559.25 ccw(c6474.79,-3511.6) C10.2@6508.48,-3545.3 ; C10.2@6525,-3550 6515.75,-3559.25 6420.75,-3559.25 ; C6.2@6725,-753.15 6737.4,-740.75 6824.25,-740.75 ; C6.2@6734.44,-750.78 cw(c6758.67,-775.01) 6758.67,-740.75 ; C6.2@6741.52,-757.85 cw(c6782.81,-799.15) 6782.81,-740.75 ; C6.2@6748.59,-764.93 cw(c6806.96,-823.29) 6806.96,-740.75 ; v1@6790,-915 ccw(c6765.86,-915) 6782.93,-897.93 ccw(c6800,-880.86) v1@6800,-905 ; v1(6800,-915) 6745,-860 6745,-820 6824.25,-740.75 ; MUX3.27@6911.81,-740.75 6824.25,-740.75 ; MUX4.27@7188.19,-3559.25 7255.75,-3559.25 ; v1@7280,-3525 cw(c7255.86,-3525) 7272.93,-3542.07 cw(c7290,-3559.14) v1@7290,-3535 ; v1(7290,-3525) 7255.75,-3559.25 ; 7293.04,-3559.25 ccw(c7293.04,-3476.71) C9.2@7351.41,-3535.07 ; 7317.19,-3559.25 ccw(c7317.19,-3500.85) C9.2@7358.48,-3542.15 ; 7341.33,-3559.25 ccw(c7341.33,-3524.99) C9.2@7365.56,-3549.22 ; C9.2@7375,-3546.85 7362.6,-3559.25 7255.75,-3559.25 ; C4.1@5084.44,-750.78 cw(c5108.67,-775.01) 5108.67,-740.75 ccw(c5108.67,-775.01) C4.1@5084.44,-750.78 ; C4.1@5091.52,-757.85 cw(c5132.81,-799.15) 5132.81,-740.75 ccw(c5132.81,-799.15) C4.1@5091.52,-757.85 ; C4.1@5098.59,-764.93 cw(c5156.96,-823.29) 5156.96,-740.75 ccw(c5156.96,-823.29) C4.1@5098.59,-764.93 ; C5.1@5909.44,-750.78 cw(c5933.67,-775.01) 5933.67,-740.75 ccw(c5933.67,-775.01) C5.1@5909.44,-750.78 ; C5.1@5916.52,-757.85 cw(c5957.81,-799.15) 5957.81,-740.75 ccw(c5957.81,-799.15) C5.1@5916.52,-757.85 ; C5.1@5923.59,-764.93 cw(c5981.96,-823.29) 5981.96,-740.75 ccw(c5981.96,-823.29) C5.1@5923.59,-764.93
  Top Layer w15: v1(3125,-1650) 3425,-1350 P13.1@3425,-1275 ; v1@3125,-1642.5 ccw(c3125,-1624.39) 3137.8,-1637.2 ccw(c3150.61,-1650) v1@3132.5,-1650 ; P13.1@3409.42,-1290.58 cw(c3371.82,-1328.18) 3425,-1328.18 cw(c3478.18,-1328.18) P13.1@3440.58,-1290.58
  Bottom Layer w15: P4.2@1009.42,-4034.42 ccw(c971.82,-3996.82) 1025,-3996.82 ccw(c1078.18,-3996.82) P4.2@1040.58,-4034.42 ; P4.2@1025,-4050 1025,-3900 1470,-3455 ; v1@2214.7,-2600.3 cw(c2201.89,-2613.11) 2220,-2613.11 cw(c2238.11,-2613.11) v1@2225.3,-2600.3 ; v1@2214.7,-2589.7 ccw(c2201.89,-2576.89) 2220,-2576.89 ccw(c2238.11,-2576.89) v1@2225.3,-2589.7 ; v1@3117.5,-1650 cw(c3099.39,-1650) 3112.2,-1662.8 cw(c3125,-1675.61) v1@3125,-1657.5 ; v1(3125,-1650) 3095,-1680 2730,-1680 2220,-2190 v1(2220,-2595) 2220,-2775 2105,-2890 1560,-2890 1470,-2980 1470,-3455 ; v1(5210,-915) v1(6040,-915) v1(6800,-915) 7410,-915 7500,-1005 7500,-3315 v1(7290,-3525) v1(6455,-3525) v1(5595,-3525) 5050,-3525 4910,-3665 4115,-3665 3905,-3455 1470,-3455 ; v1@5215.3,-920.3 cw(c5228.11,-933.11) 5228.11,-915 cw(c5228.11,-896.89) v1@5215.3,-909.7 ; v1@5589.7,-3530.3 ccw(c5576.89,-3543.11) 5576.89,-3525 ccw(c5576.89,-3506.89) v1@5589.7,-3519.7 ; v1@5600.3,-3530.3 cw(c5613.11,-3543.11) 5613.11,-3525 cw(c5613.11,-3506.89) v1@5600.3,-3519.7 ; v1@6034.7,-920.3 ccw(c6021.89,-933.11) 6021.89,-915 ccw(c6021.89,-896.89) v1@6034.7,-909.7 ; v1@6045.3,-920.3 cw(c6058.11,-933.11) 6058.11,-915 cw(c6058.11,-896.89) v1@6045.3,-909.7 ; v1@6449.7,-3530.3 ccw(c6436.89,-3543.11) 6436.89,-3525 ccw(c6436.89,-3506.89) v1@6449.7,-3519.7 ; v1@6460.3,-3530.3 cw(c6473.11,-3543.11) 6473.11,-3525 cw(c6473.11,-3506.89) v1@6460.3,-3519.7 ; v1@6794.7,-920.3 ccw(c6781.89,-933.11) 6781.89,-915 ccw(c6781.89,-896.89) v1@6794.7,-909.7 ; v1@6805.3,-920.3 cw(c6818.11,-933.11) 6818.11,-915 cw(c6818.11,-896.89) v1@6805.3,-909.7 ; v1@7284.7,-3530.3 ccw(c7271.89,-3543.11) 7271.89,-3525 ccw(c7271.89,-3506.89) v1@7284.7,-3519.7 ; v1@7290,-3517.5 ccw(c7290,-3499.39) 7302.8,-3512.2 ccw(c7315.61,-3525) v1@7297.5,-3525
VSUPPLY: C14.1 DC2.22 DC2.23 FPGA_Board1.24 J1.1 J1.1A J1.1B P1.24 RD2.1 | length 4695
  Top Layer w15: DC2.23@300,-3225 DC2.22@400,-3225 625,-3225 C14.1@875,-2975 ; DC2.23@312.37,-3237.37 cw(c342.25,-3267.25) 342.25,-3225 cw(c342.25,-3182.75) DC2.23@312.37,-3212.63 ; DC2.22@387.63,-3237.37 ccw(c357.75,-3267.25) 357.75,-3225 ccw(c357.75,-3182.75) DC2.22@387.63,-3212.63 ; DC2.22@412.37,-3237.37 cw(c442.25,-3267.25) 442.25,-3225 cw(c442.25,-3182.75) DC2.22@412.37,-3212.63 ; RD2.1@584.42,-2440.58 cw(c546.82,-2478.18) 600,-2478.18 cw(c653.18,-2478.18) RD2.1@615.58,-2440.58 ; RD2.1@600,-2425 600,-2580 644.09,-2624.09 J1.1B@644.09,-2736.42 J1.1@644.09,-2785.63 ; J1.1@621.56,-2713.88 ccw(c567.15,-2659.48) 644.09,-2659.48 ccw(c721.04,-2659.48) J1.1@666.63,-2713.88 ; J1.1@628.52,-2720.84 ccw(c590.92,-2683.24) 644.09,-2683.24 ccw(c697.27,-2683.24) J1.1@659.67,-2720.84 ; J1.1@632.17,-2724.49 ccw(c603.37,-2695.69) 644.09,-2695.69 ccw(c684.82,-2695.69) J1.1@656.02,-2724.49 ; J1.1@644.09,-2866.71 cw(c644.09,-3062.46) 782.51,-2924.05 ; J1.1@644.09,-2856.87 cw(c644.09,-3028.86) 765.71,-2907.24 ; J1.1@644.09,-2851.71 cw(c644.09,-3011.25) 756.9,-2898.44 ; J1.1@644.09,-2841.87 cw(c644.09,-2977.65) 740.1,-2881.64 ; J1.1@644.09,-2836.71 cw(c644.09,-2960.04) 731.3,-2872.83 ; J1.1@644.09,-2826.87 cw(c644.09,-2926.43) 714.5,-2856.03 ; J1.1@644.09,-2821.71 cw(c644.09,-2908.82) 705.69,-2847.23 ; J1.1@644.09,-2811.87 cw(c644.09,-2875.22) 688.89,-2830.42 ; J1.1@645.7,-2833.89 ccw(c712.22,-2794.3) 693.18,-2869.33 ; J1.1@658.59,-2826.22 ccw(c756.23,-2768.11) 728.28,-2878.24 ; J1.1@659.32,-2827.58 ccw(c705.01,-2805.79) 691.91,-2854.68 ; J1.1@660.03,-2862.44 cw(c686.91,-2909.01) 700.83,-2857.07 ; C14.1@855.93,-2975 cw(c809.87,-2975) 842.44,-3007.56 cw(c875,-3040.13) C14.1@875,-2994.07 ; C14.1@860.53,-2987.43 ccw(c833.47,-3010.68) 833.47,-2975 ; C14.1@860.53,-2962.57 cw(c833.47,-2939.32) 833.47,-2975 ; C14.1@888.49,-2988.49 cw(c921.05,-3021.05) 921.05,-2975 cw(c921.05,-2928.95) C14.1@888.49,-2961.51 ; P1.24@1587.97,-2990 ccw(c1534.79,-2990) 1572.4,-2952.4 ccw(c1610,-2914.79) P1.24@1610,-2967.97 ; FPGA_Board1.24@1594.42,-3289.42 ccw(c1556.82,-3251.82) 1610,-3251.82 ccw(c1663.18,-3251.82) FPGA_Board1.24@1625.58,-3289.42 ; P1.24@1594.42,-3005.58 cw(c1556.82,-3043.18) 1610,-3043.18 cw(c1663.18,-3043.18) P1.24@1625.58,-3005.58 ; FPGA_Board1.24@1610,-3305 P1.24@1610,-2990 1515,-2895 1030,-2895 950,-2975 C14.1@875,-2975 ; J1.1@644.09,-2785.63 ccw(c600.14,-2785.63) 629.42,-2752.85 cw(c600.14,-2785.63) J1.1@644.09,-2785.63 ; J1.1@644.09,-2785.63 cw(c688.05,-2785.63) 658.77,-2752.85 ccw(c688.05,-2785.63) J1.1@644.09,-2785.63 ; J1.1@644.09,-2785.63 833.46,-2975 ; 833.46,-2975 C14.1@875,-2975
pads on no net: DACA1.1 DACA1.2 DACB1.1 DACB1.2 DC1.6 LevelTr1.4 LevelTr1.5 LevelTr1.6 LevelTr1.9 LevelTr1.10 LevelTr1.11 MUX1.2 MUX1.3 MUX1.13 MUX2.2 MUX2.3 MUX2.13 MUX3.2 MUX3.3 MUX3.13 MUX4.2 MUX4.3 MUX4.13 MUX5.2 MUX5.3 MUX5.13 MUX6.2 MUX6.3 MUX6.4 MUX6.5 MUX6.6 MUX6.7 MUX6.8 MUX6.9 MUX6.10 MUX6.11 MUX6.13 MUX6.14 MUX6.15 MUX6.23 MUX6.24 MUX6.25 MUX6.26 MUX7.2 MUX7.3 MUX7.13 R9.1 R13.1 R14.1 RR1. U3.5 U3.6 U3.7

## Polygon pours and split planes (outlines as drawn)
GND on Top Layer "Top Layer-No Net" (solid, pour order 5): 75,-75 75,-4325 7575,-4325 7575,-75 75,-75
GND on Bottom Layer "Top Layer-No Net" (solid, pour order 7): 75,-75 75,-4325 7575,-4325 7575,-75 75,-75

## Silkscreen, mask and mechanical layers (free items; w line width, h text height)
Top Overlay:
  lines w7.87: 500,-1350 1000,-1350 1250,-1350 1250,-1100 500,-1100 500,-1350 ; 1600,-1350 2350,-1350 2350,-1100 1600,-1100 1600,-1350 ; 2750,-1350 2750,-1100 3500,-1100 3500,-1350 2750,-1350 ; 3900,-1350 3900,-1100 4650,-1100 4650,-1350 3900,-1350
  text "GND" at 3790,-920 h60 r90
  text "Vf" at 825,-1075 h60
  text "Vst" at 1900,-1075 h60
  text "Vrs" at 3025,-1075 h60
  text "Vrd" at 4200,-1075 h60
  text "Brdg" at 4160,-1185 h60
  text "Ban" at 545,-1195 h60
  text "BNC" at 795,-1195 h60
  text "Vdd" at 1040,-1195 h60
  text "Vdd" at 2140,-1195 h60
  text "DAC" at 3950,-1195 h60
  text "Ban" at 1640,-1200 h60
  text "BNC" at 1895,-1200 h60
  text "Ban" at 2790,-1200 h60
  text "BNC" at 3035,-1200 h60
  text "Vss" at 3285,-1200 h60
  text "BNC" at 4430,-1200 h60
  text "IN-" at 3820,-1545 h60
  text "Vf" at 950,-1550 h60
  text "Vrs" at 2880,-1550 h60
  text "Vst" at 1835,-1570 h60
  text "Co" at 4775,-1575 h60
  text "PotB" at 150,-1600 h60
  text "Vcomp" at 3375,-1675 h60
  text "IN+" at 2355,-1790 h60
  text "BJT1" at 600,-1850 h60
  text "BJT2" at 900,-1850 h60
  text "C-" at 4775,-1850 h60
  text "PotR" at 175,-2025 h60
  text "C-" at 2025,-2025 h60
  text "Res1" at 600,-2075 h60
  text "Res2" at 900,-2075 h60
  text "C+" at 4500,-2125 h60
  text "C+" at 3475,-2175 h60
  text "Co" at 4000,-2325 h60
  text "Vbrdg" at 4575,-2330 h60
  text "PWR" at 450,-2350 h60
  text "TryR" at 725,-2350 h60
  text "TryB" at 1200,-2350 h60
  text "Vtin" at 1400,-2475 h60
  text "LSI-PLLGA100" at 5880,-2545 h60
  text "Vbr" at 4675,-2875 h60
  text "3.3V" at 4545,-2945 h60 r270
  text "99" at 4950,-2950 h60
  text "51" at 7400,-2950 h60
  text "100" at 4900,-3300 h60
  text "52" at 7400,-3300 h60
  text "Vdd" at 700,-4075 h60
  text "Vss" at 1225,-4075 h60
  text "ReRAM Board Rev.1" at 6040,-4280 h60
Mechanical 1:
  lines w10: 50,-4350 7600,-4350 7600,-50 50,-50 50,-4350
Mechanical 11:
  lines w5: 382.91,-2825 ccw(c400,-2825) 417.06,-2826 ; 382.94,-2745 cw(c400,-2746) 417.09,-2746 ; 383,-2827 383,-2745 ; 417,-2827 417,-2745 ; 478,-2999.06 cw(c479,-2982) 479,-2964.91 ; 478,-2999 560,-2999 ; 478,-2965 560,-2965 ; 558,-2999.09 ccw(c558,-2982) 559,-2964.94 ; 626.97,-2835 ccw(c644,-2835) 661,-2836 ; 627,-2838 627,-2735 cw(c644,-2736) 661.03,-2736 ; 661,-2838 661,-2735
  lines w10: 50,-4350 7600,-4350 7600,-50 50,-50 50,-4350

## Text inside footprints (layer, text, board x,y; h text height)
J1: Mechanical 1 "Plated slots" at 350,-2625 h30
P23: Top Overlay "1" at 5000,-1400 h50; Top Overlay "2" at 5000,-1050 h50; Top Overlay "49" at 7400,-1400 h50; Top Overlay "50" at 7400,-1050 h50